# Altium PCB Radar.PcbDoc (part 1 of 3)
Units mil, origin at the board's own origin, x right, y up, seen from the top; angles counter-clockwise.
Board outline 2145 x 1580 mil, 4 copper layers (Layer 1, Layer 2, Layer 3, Layer 4), stack 61.58 mil thick; 62 components, 38 nets, 226 pads, 53 vias.
Unrouted connection lines stored in the file: 17.
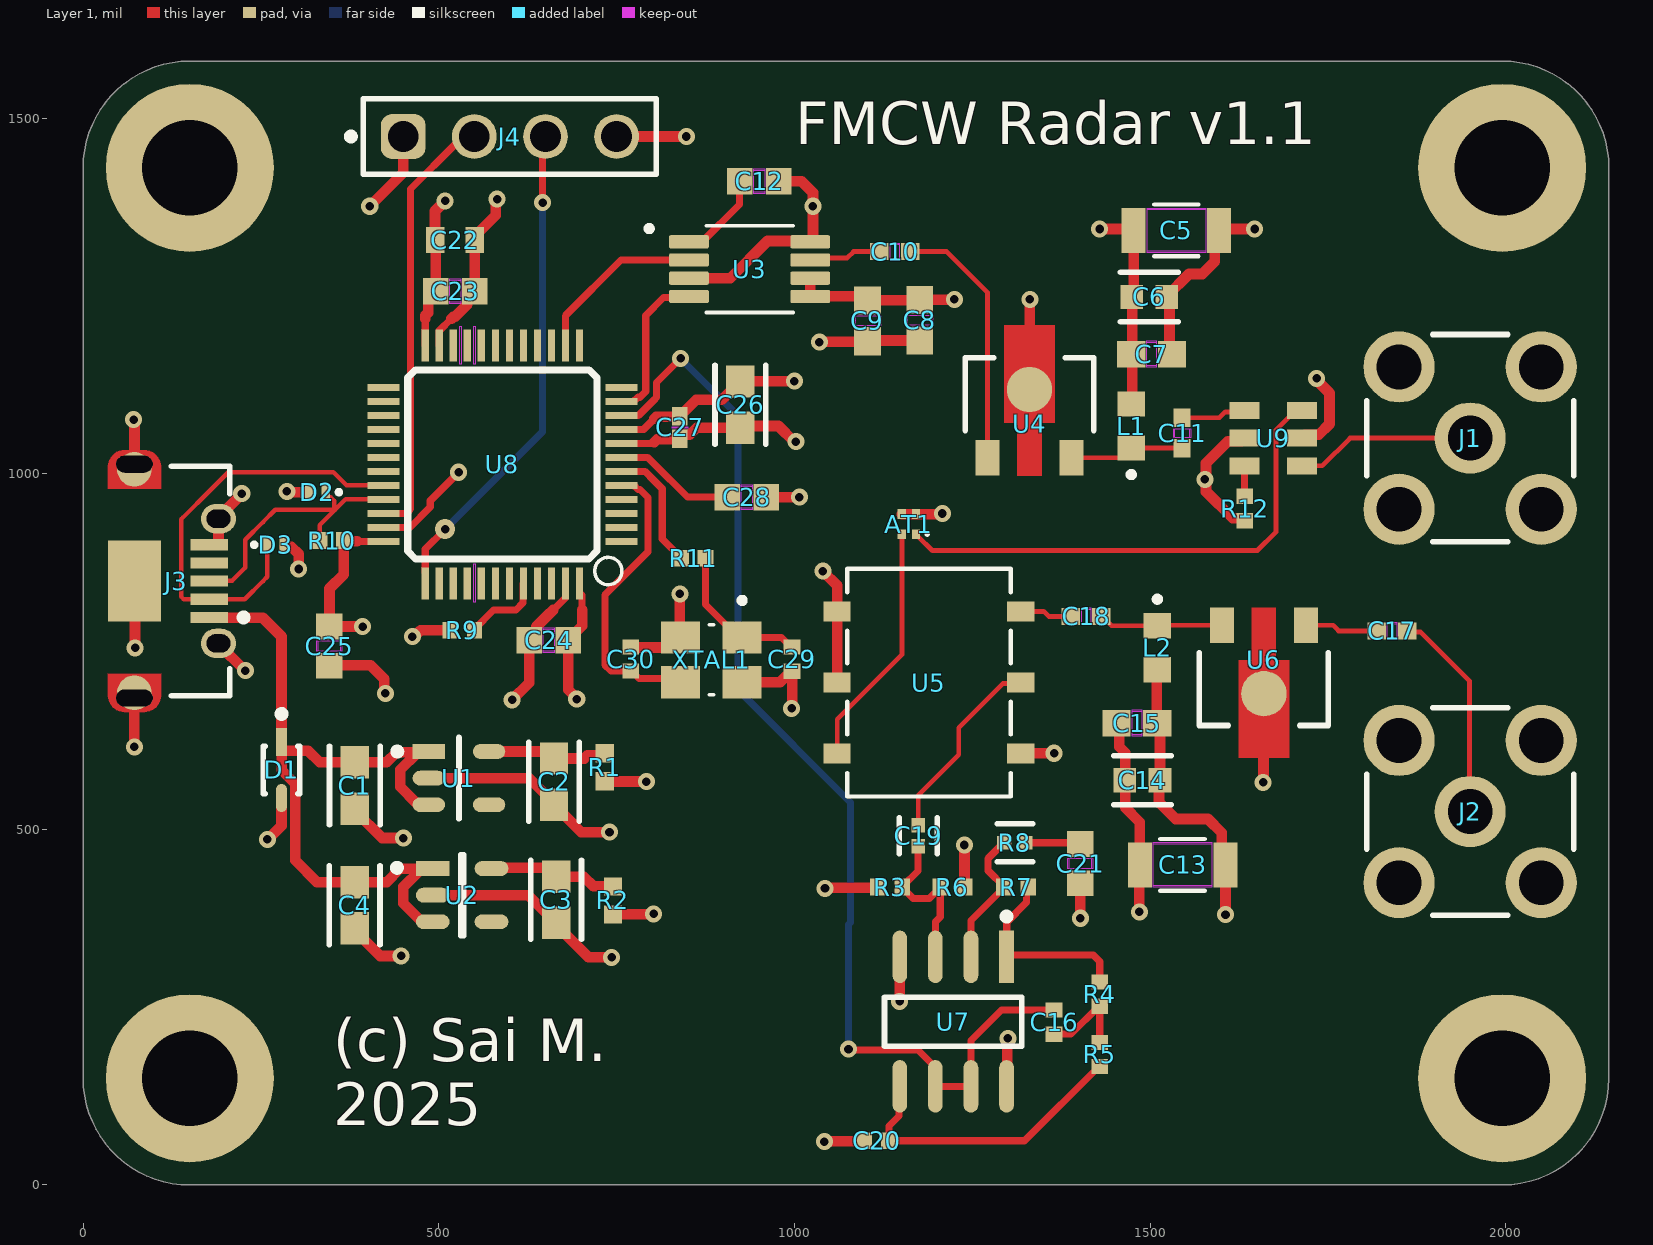
[diagram p0: Layer 1 view]
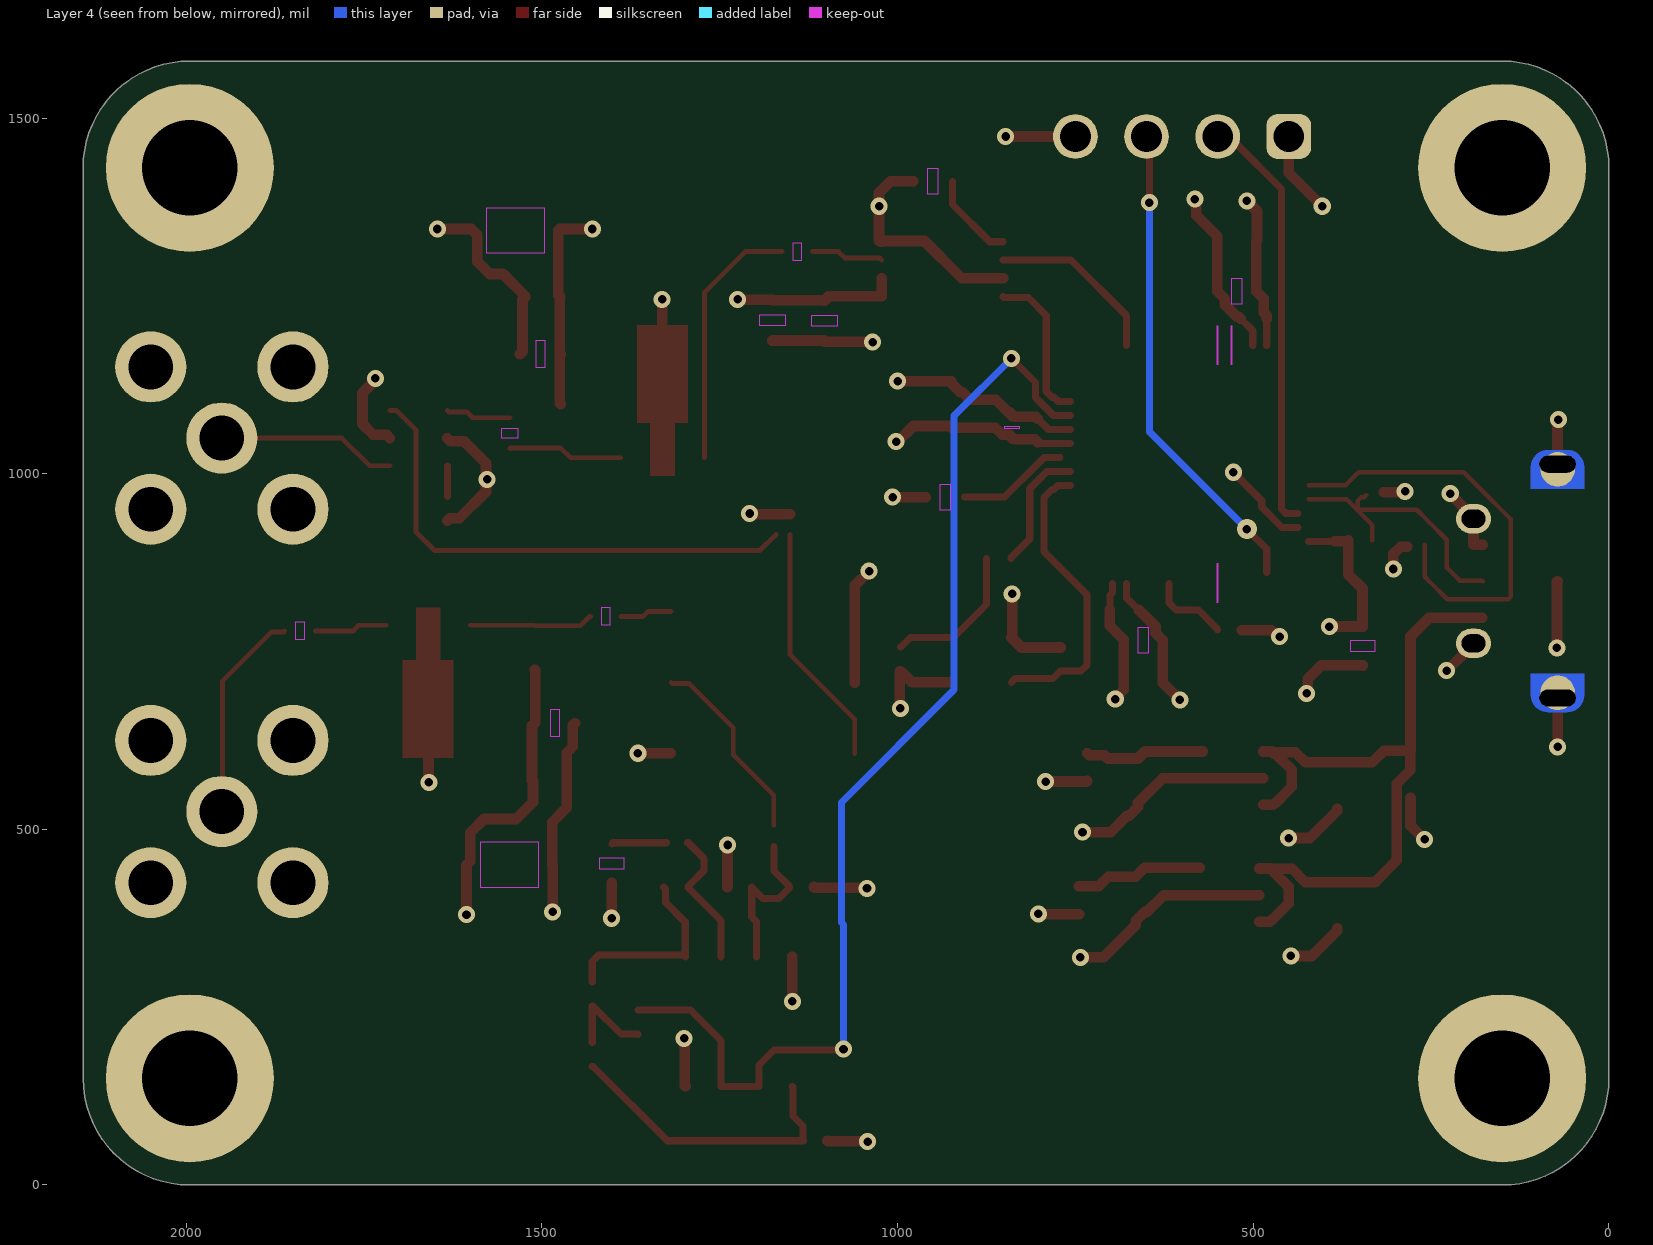
[diagram p1: Layer 4 view, seen from below]
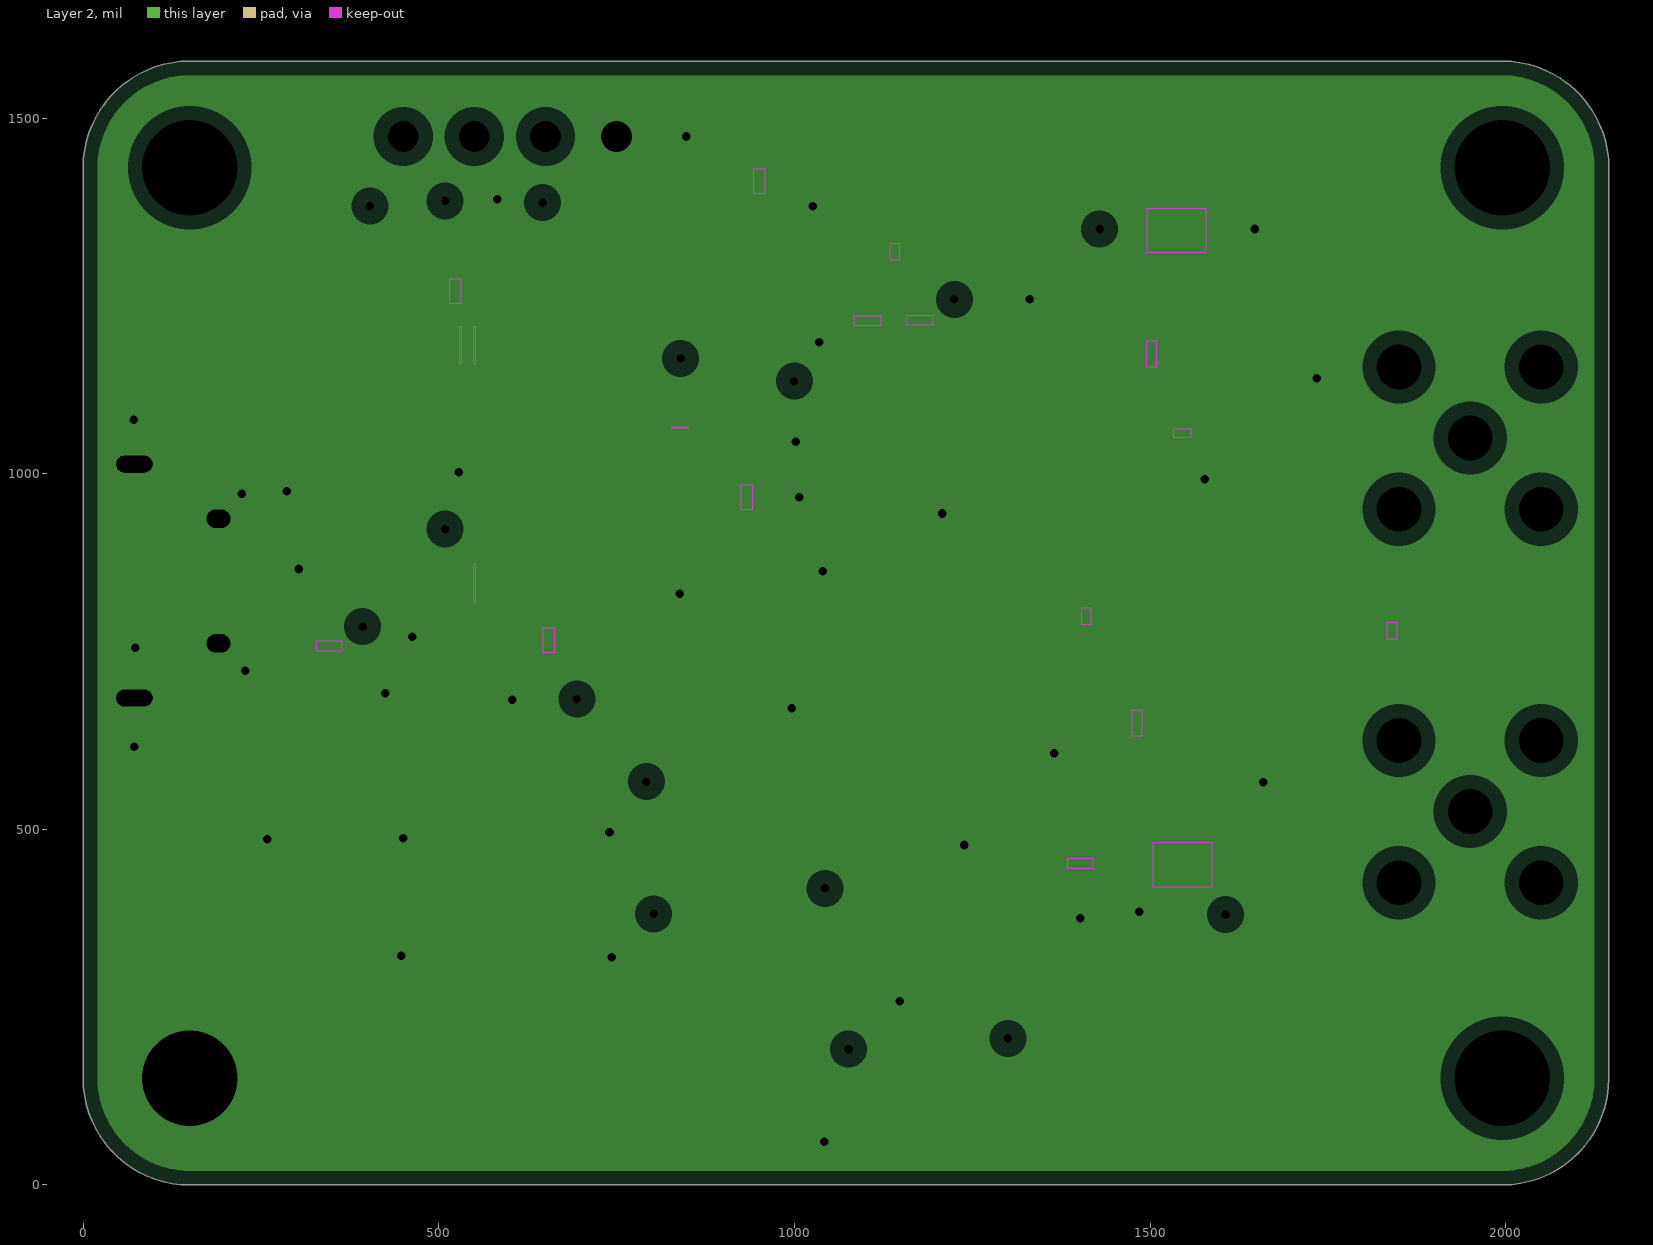
[diagram p2: Layer 2, clearances drawn from the general rule]
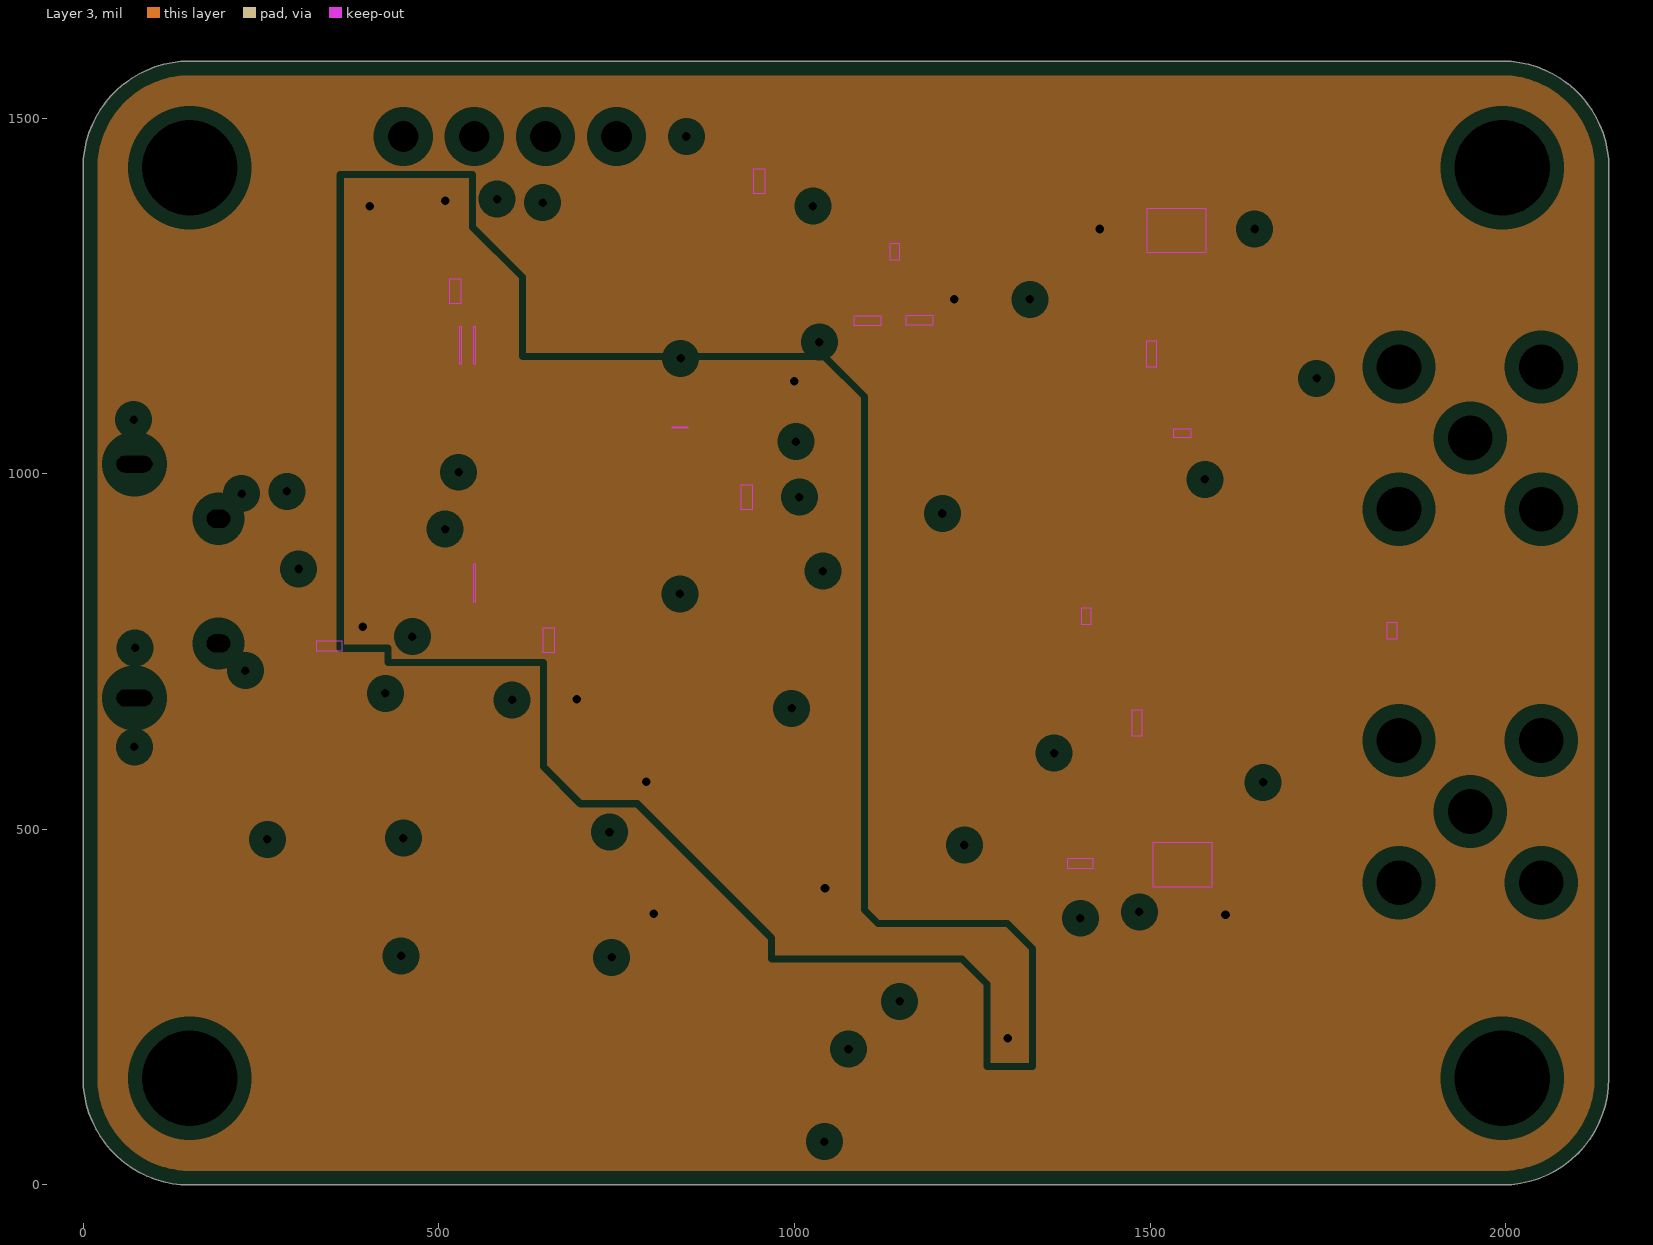
[diagram p3: Layer 3, clearances drawn from the general rule]
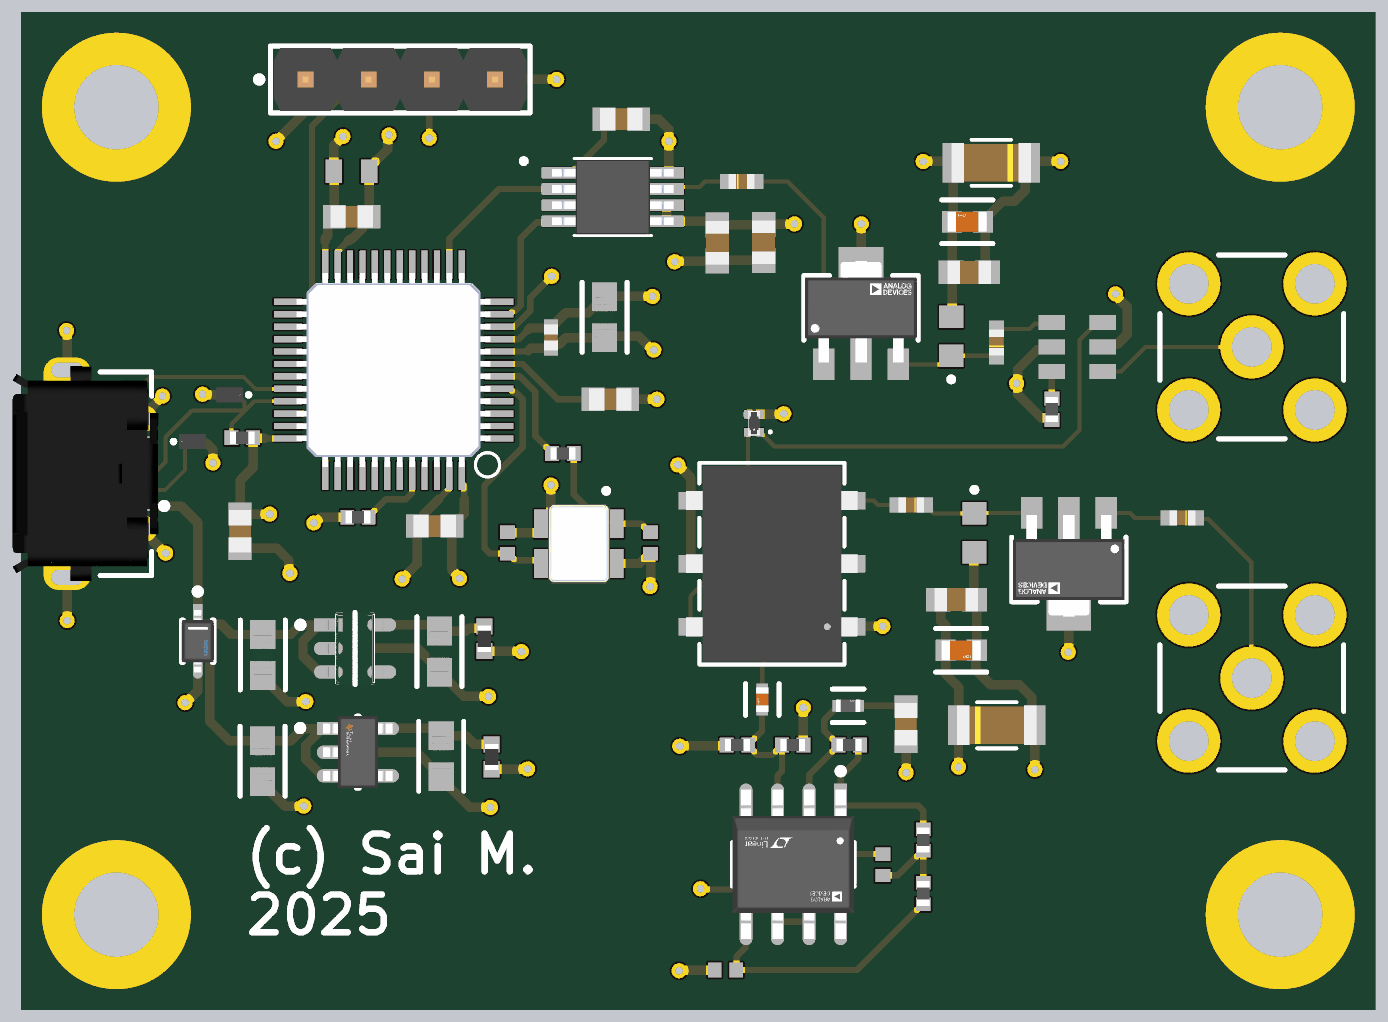
[diagram p5: 3D render of the assembled board from above, using the file's embedded part models]

## Layer stack, top to bottom
Top Solder: solder mask 0.4, Solder Resist, Dk 3.8
Layer 1: signal copper 1.38
Dielectric 2: prepreg 3.91, 3313 RC57%, Dk 4.1
Layer 2: plane copper 0.6, net GND
Dielectric 1: core 49.8, FR-4, Dk 4.6
Layer 3: plane copper 0.6, net +5V
Dielectric 3: prepreg 3.91, 3313 RC57%, Dk 4.1
Layer 4: signal copper 1.38
Bottom Solder: solder mask 0.4, Solder Resist, Dk 3.8

## Board outline
0,150 0,1430 cw(c150,1430) 150,1580 1995,1580 cw(c1995,1430) 2145,1430 2145,150 cw(c1995,150) 1995,0 150,0 cw(c150,150)

## Design rules (kind name [scope] priority, off if disabled: settings)
Clearance "Keepout & Pad Distance" [(IsPad OR IsTrack) vs (IsKeepOut)] p1: gap=0 ignorepadtopadclearanceinfootprint=TRUE
Clearance [NOT WithinRoom('USB') vs NOT WithinRoom('USB')] p2: gap=10 ignorepadtopadclearanceinfootprint=TRUE except(3.5: Arc-Arc Arc-Track Track-Track; 3.94: Arc-SMDPad Track-SMDPad; 5.91: SMDPad-SMDPad; 7.87: Arc-Via Track-Via; 11.02: Arc-THPad Track-THPad)
DiffPairsRouting DIFF90 [InDifferentialPairClass('USB')] p1: maxlimit=8.1 minlimit=8 mostfreqgap=8 toplayer_minwidth=6.23 toplayer_maxwidth=6.43 toplayer_prefwidth=6.23 bottomlayer_minwidth=6.23 bottomlayer_maxwidth=6.43 bottomlayer_prefwidth=6.23 maxuncoupledlength=500
HoleSize [All] p1: absolutevalues=TRUE maxlimit=248.03 minlimit=5.91 maxpercent=80.000 minpercent=20.000
MinimumSolderMaskSliver [All] p1: minsoldermaskwidth=3.94
PlaneClearance [All] p1: clearance=20
PlaneConnect [All] p1: planeconnectstyle=Direct reliefexpansion=20 reliefentries=4 reliefconductorwidth=10 reliefairgap=10
PolygonConnect [All] p1: connectstyle=Relief reliefconductorwidth=10 reliefentries=4 polygonreliefangle="90 Angle" airgapwidth=10
RoomDefinition Attenuator [False vs False] p1: confinementstyle=ConfineIn formatcopy=TRUE lockcomponents=FALSE outline 1139.37,956.91 1193,956.91 1193,901.65 1139.37,901.65
RoomDefinition USB [False vs False] p2: confinementstyle=ConfineIn formatcopy=TRUE lockcomponents=FALSE outline 141,976 253,976 253,719 141,719
RoomDefinition STM32 [False vs False] p3: confinementstyle=ConfineIn formatcopy=TRUE lockcomponents=FALSE outline 385,1218 803,1218 803,808.32 385,808.32
RoutingVias [All] p1: holewidth=12 width=24 viastyle="Through Hole" minholewidth=12 minwidth=24 maxholewidth=12 maxwidth=24
SilkToSolderMaskClearance [IsPad] p1: minsilkscreentomaskgap=3.94 clearancetoexposedcopper=FALSE
SolderMaskExpansion [All] p1: expansion=3 istentingtop=FALSE
SupplyNets "Schematic Supply Nets_3" [InNet('+5V')] p1: voltage=0.000
SupplyNets "Schematic Supply Nets_2" [InNet('GND')] p2: voltage=0.000
SupplyNets "Schematic Supply Nets_1" [InNet('+3V3')] p3: voltage=0.000
SupplyNets "Schematic Supply Nets" [InNet('VBUS')] p4: voltage=0.000
Width "RF Traces" [InNetClass('RF_Trace')] p1: maxlimit=6.68 minlimit=6.68 preferedwidth=6.68 impedanceprofiledriven=TRUE impedanceprofileid={13399BCB-B655-4F76-96A9-7004584BC017} impedanceprofilevalue=50.000000 minimp=50.000000 maximp=50.000000 favimp=50.000000
Width Power/GND [(InNet('+5V') OR InNet('+3V3') OR InNet('VBUS') OR InNet('GND') OR InNet('NetC2_2') OR InNet('NetC3_2')) AND (NOT WithinRoom('STM32'))] p2: maxlimit=15 minlimit=15 preferedwidth=15 minimp=50.000000 maximp=50.000000 favimp=50.000000
Width Signal [All] p3: maxlimit=10 minlimit=10 preferedwidth=10
24 further rules are at their usual default settings.

## Classes and differential pairs
net class RF_Trace: NetAT1_2 NetC10_1 NetC10_2 NetC11_1 NetC11_2 NetC17_1 NetC17_2 NetC18_1 NetC18_2 NetC19_1 NetJ1_1 SPLT_TX_OUT
differential pair class USB: USB
component class Transmitter-2.4GHz: C5 C6 C7 C8 C9 C10 C11 C12 J1 L1 R12 U3 U4 U9 Wilkinson1
component class Receiver-2.4GHz: AT1 C13 C14 C15 C16 C17 C18 C19 C20 C21 J2 L2 R3 R4 R5 R6 R7 R8 U5 U6 U7
component class Power: C1 C2 C3 C4 R1 R2 U1 U2
component class MCU: C22 C23 C24 C25 C26 C27 C28 C29 C30 D1 D2 D3 J3 J4 R9 R10 R11 U8 XTAL1
differential pair USB: +USB_P -USB_N

## Components (designator, comment, footprint, x,y, rotation, side; value= is the part's Value field where it differs from the comment)
AT1 "PAT0510S-C-3DB-T10" PAT0510SC3DBT10 1161,929 r180 top
C1 "1uF, 10V" FP-CL10-IPC_A 382.07,561.56 r90 top value=1uF
C2 "1uF, 10V" FP-CL10-IPC_A 662.07,567 r90 top value=1uF
C3 "2.2uF, 10V" FP-CL10-IPC_A 665,401 r90 top value=2.2uF
C4 "1uF, 10V" FP-CL10-IPC_A 381.74,393.2 r90 top value=1uF
C5 "10uF, 25V" CAP_CL31_SAM 1537,1342 r180 top value=10uF
C6 "1nF, 50V" FP-0603-L_1_6_0_15-W_0_81-IPC_C 1498.98,1248.38 r180 top value=1nF
C7 "100pF, 50V" CAPC17595_87N_KEM 1502.07,1168.1 r180 top value=100pF
C8 "220pF, 50V" CAPC17595_87N_KEM 1176.06,1215.74 r90 top value=220pF
C9 "220pF, 50V" CAPC17595_87N_KEM 1102.65,1214.91 r90 top value=220pF
C10 "100pF, 50V" CAP_CC0402_YAG 1141.04,1312.19 r0 top value=100pF
C11 "100pF, 50V" CAP_CC0402_YAG 1545,1057 r90 top value=100pF
C12 "0.1uF, 50V" CAP_CC0603_YAG-M 950.5,1411 r180 top value=100nF
C13 "10uF, 25V" CAP_CL31_SAM 1545.66,450.08 r0 top value=10uF
C14 "1nF, 50V" FP-0603-L_1_6_0_15-W_0_81-IPC_C 1489.29,569.04 r0 top value=1nF
C15 "100pF, 50V" CAPC17595_87N_KEM 1481.52,649.32 r0 top value=100pF
C16 "150pF, 16V" CAPC1005X55N 1365,228.99 r90 top
C17 "100pF, 50V" CAP_CC0402_YAG 1840,779 r180 top value=100pF
C18 "100pF, 50V" CAP_CC0402_YAG 1410.17,799.32 r180 top value=100pF
C19 "220nF, 16V" FP-GRM155-0_05-IPC_C 1174,491 r270 top value=220nF
C20 "750pF, 50V" CAPC1005X55N 1115.53,62.17 r0 top value=750pF
C21 "330nF, 25V" CAP_CC0603_YAG-M 1401.71,451.95 r90 top value=330nF
C22 "4.7uF, 10V" CAPC1608X90N 522.72,1328.47 r180 top value=4.7uF
C23 "0.1uF, 50V" CAP_CC0603_YAG-M 523.08,1256.47 r180 top value=100nF
C24 "0.1uF, 50V" CAP_CC0603_YAG-M 654.5,766 r0 top value=100nF
C25 "0.1uF, 50V" CAP_CC0603_YAG-M 346,757.69 r90 top value=100nF
C26 "1uF, 10V" FP-CL10-IPC_A 924,1097 r90 top value=1uF
C27 "10nF, 50V" CAPC10555_55N_KEM 839,1065 r90 top value=10nF
C28 "0.1uF, 50V" CAP_CC0603_YAG-M 933,967 r180 top value=100nF
C29 "8pF, 50V" CAPC1005X55N 996.52,739.32 r90 top value=8pF
C30 "8pF, 50V" CAPC1005X55N 769.82,739.44 r270 top value=8pF
D1 "DESD5V0S1BA-7" FP-SOD323-IPC_C 278.98,583.46 r270 top
D2 "DESD3V3E1BL-7B" CR_X1-DFN1006-2_DIO 329.5,974 r180 top
D3 "DESD3V3E1BL-7B" CR_X1-DFN1006-2_DIO 270.51,899.98 r0 top
J1 "CONREVSMA002" CON-REVSMA-RA 1950,1050 r0 top
J2 "CONREVSMA002" CON-REVSMA-RA 1950,525 r0 top
J3 "USB Micro A/B Connector" FP-47590-0001-MFG 80,849 r270 top
J4 "1x4 Male Headers" 61300411121 600,1474 r0 top
L1 "100nH" INDC1608X95N 1473.5,1066.95 r270 top
L2 "100nH" INDC1608X95N 1510.17,755.23 r90 top
R1 "0" RESC1005X40X25ML05T05 733.33,587.38 r270 top value=0R
R2 "0" RESC1005X40X25ML05T05 744.84,400.16 r270 top value=0R
R3 "33K" RESC1005X40N 1134.54,418.91 r180 top
R4 "10K" RESC1005X37N 1429.17,268.33 r270 top value=10kR
R5 "10K" RESC1005X37N 1429.17,183.53 r270 top value=10kR
R6 "33K" RESC1005X40N 1222.16,418.91 r180 top
R7 "300K" RESC1005X40N 1311.64,418.91 r0 top value=300kR
R8 "1K" FP-RC0402-0_4-IPC_C 1309.96,481.07 r0 top value=1kR
R9 "10K" RESC1005X37N 533.01,780 r0 top value=10kR
R10 "1.5K" RESC1005X40N 349.51,906.01 r180 top value=1.5kR
R11 "390" RESC1005X40N 857.87,881 r0 top value=390R
R12 "50" RESC1005X35N 1633,951 r90 top value=50R
U1 "MIC5317-3.3YM5-TR" FP-SOT23-5LD-PL-1-IPC_C 528.4,572 r0 top
U2 "TPS7A2450DBVR" FP-DBV0005A-IPC_C 532.85,407.46 r0 top
U3 "MAX2750AUA+" SOP65P490X110-8N 936.94,1287.6 r0 top
U4 "ADL5545ARKZ-R7" ADL5545ARKZ-R7 1330.5,1111.95 r0 top
U5 "IC MIXER 200MHZ-3GHZ SMD" CD542_MNC 1189.17,706.32 r180 top
U6 "ADL5545ARKZ-R7" ADL5545ARKZ-R7 1659.93,697.15 r180 top
U7 "LT6231IS8#PBF" FP-LT6231IS8#PBF-IPC_C 1223.17,229.71 r270 top
U8 "STM32F303CBT6" LQFP-48 589.32,1013.14 r90 top
U9 "BDCN-10-25+" BDCN-10-25+ 1633,1088.98 r0 top
XTAL1 "16 MHz, 9 pF" XTAL_TSX-3225_16.0000MF18X-AC0 883.17,738.18 r270 top

## Footprints (in the part's own frame and the unit in brackets; to place one, negate y for a bottom-side part, rotate by r counter-clockwise, add the part's x,y. Pads: shape width x height; smd on the part's side, far side on the other; paste and mask are expansions set on the pad)
61300411121 [mm] "Pin Header, pitch 2.54 mm, THT, Vertical, single row, 4p"
  rrect50% 1.6x1.6 hole 1.1: 1(-3.81,0)
  round 1.6 hole 1.1: 2(-1.27,0) 3(1.27,0) 4(3.81,0)
  silkscreen extent -5.8,-1.35 5.23,1.35, body extent -5.08,-1.27 5.08,1.27, height 8.57
ADL5545ARKZ-R7 [mm]
  rect 0.86x1.27 smd paste+0 mask+0: 1(-1.5,-2.278) 3(1.5,-2.278)
  round 1.62 smd paste+0 mask+0: 2(0,0.164)
  Layer 1 region: -0.9,2.458 0.9,2.458 0.9,-1.022 0.43,-1.022 0.43,-2.913 -0.43,-2.913 -0.43,-1.022 -0.9,-1.022 -0.9,2.458
  silkscreen extent -2.3,-1.3 2.3,1.3, body extent -2.4,-3.01 2.4,2.56, height 0.25
BDCN-10-25+ [mm]
  rect 1.07x0.61 smd paste+0 mask+0: 1(0,0) 2(0,-0.99) 3(0,-1.98) 4(2.05,-1.98) 5(2.05,-0.99) 6(2.05,0)
CAP_CC0402_YAG [mil]
  rect 26x24 smd paste+0 mask+0: 1(-21.5,0) 2(21.5,0)
  Layer 1 keep-out region: -6.5,-10 -6.5,10 6.5,10 6.5,-10
  Keep-Out Layer region: -6.5,-12 -6.5,12 6.5,12 6.5,-12
  body extent -21,-12 21,12, height 22
CAP_CC0603_YAG-M [mil]
  rect 36x37 smd paste+0 mask+0: 1(-27.5,0) 2(27.5,0)
  Layer 1 keep-out region: -7.5,-15.5 -7.5,15.5 7.5,15.5 7.5,-15.5
  Keep-Out Layer region: -7.5,-17.5 -7.5,17.5 7.5,17.5 7.5,-17.5
  body extent -34,-17 34,17, height 35
CAP_CL31_SAM [mm]
  rect 0.856x1.6 smd paste+0 mask+0: 1(-1.528,0) 2(1.528,0)
  Layer 1 keep-out region: -1.049,-0.749 -1.049,0.749 1.049,0.749 1.049,-0.749
  Keep-Out Layer region: -1.049,-0.8 -1.049,0.8 1.049,0.8 1.049,-0.8
  silkscreen extent -0.79,-0.93 0.79,0.93, body extent -1.6,-0.8 1.6,0.8, height 1
CAPC1005X55N [mm]
  rect 0.54x0.6 smd: 1(-0.432,0) 2(0.432,0)
CAPC1608X90N [mil]
  rect 26x37 smd: 1(-28,0) 2(28,0)
CAPC10555_55N_KEM [mm]
  rect 0.653x0.55 smd paste+0 mask+0: 1(-0.402,0) 2(0.402,0)
  Layer 1 keep-out region: -0.024,-0.224 -0.024,0.224 0.024,0.224 0.024,-0.224
  Keep-Out Layer region: -0.024,-0.275 -0.024,0.275 0.024,0.275 0.024,-0.275
  body extent -0.53,-0.28 0.53,0.28, height 0.55
CAPC17595_87N_KEM [mm]
  rect 1.006x0.95 smd paste+0 mask+0: 1(-0.728,0) 2(0.728,0)
  Layer 1 keep-out region: -0.174,-0.424 -0.174,0.424 0.174,0.424 0.174,-0.424
  Keep-Out Layer region: -0.174,-0.475 -0.174,0.475 0.174,0.475 0.174,-0.475
  body extent -0.87,-0.48 0.87,0.48, height 0.87
CD542_MNC [mil]
  rect 38x28 smd paste+0 mask+0: 1(-129,100) 2(-129,0) 3(-129,-100) 4(129,-100) 5(129,0) 6(129,100)
  silkscreen extent -115,-160 115,160, body extent -136,-155 136,155, height 112
CON-REVSMA-RA [mil] "Connector, RP-SMA Female, 5-Lead, Thru-Hole, Right-Angle, Body 7x7mm"
  round 100 hole 63: 1(0,0) 2(-100,100) 3(100,100) 4(100,-100) 5(-100,-100)
  silkscreen extent -146,-146 146,146
CR_X1-DFN1006-2_DIO [mil]
  rect 12x20 smd paste+0 mask+0: 1(-11.5,0) 2(11.5,0)
  silkscreen extent -33,-3 -27,3, body extent -21,-12 21,12, height 21
FP-0603-L_1_6_0_15-W_0_81-IPC_C [mil]
  rect 31.75x34.18 smd paste+0 mask+0: 1(-24.64,0) 2(24.64,0)
  silkscreen extent -41,-35 41,35, body extent -44,-23 44,23, height 10
FP-47590-0001-MFG [mm]
  rect 0.4x1.35 smd paste+0 mask+0: 1(1.3,2.475) 2(0.65,2.475) 3(0,2.475) 4(-0.65,2.475) 5(-1.3,2.475)
  rrect100% 1.05x1.25 hole 0.85 slot 0.65 at 0 deg paste-2539.97 mask+0: 6(-2.225,2.8) 7(2.225,2.8)
  rrect100% 0.6x1.3 hole 1.3 slot 0.6 at 0 deg paste-2539.97 mask+0: 8(-4.175,-0.2) 10(4.175,-0.2)
  round 1.238 smd paste-1000 mask+0: 8(-3.988,-0.2) 10(3.988,-0.2)
  round 1.238 smd far side paste-1000 mask+0: 8(-3.988,-0.2) 10(3.988,-0.2)
  rect 2.9x1.9 smd paste+0 mask+0: 9(0,-0.2)
  Layer 1 region: 3.3,0.75 4.075,0.75 4.305,0.704 4.499,0.574 4.629,0.38 4.675,0.15 4.675,0.15 4.675,-0.55 4.629,-0.78 4.499,-0.974 4.305,-1.104 4.075,-1.15 4.075,-1.15 3.3,-1.15
  Layer 1 region: -3.3,-1.15 -4.075,-1.15 -4.305,-1.104 -4.499,-0.974 -4.629,-0.78 -4.675,-0.55 -4.675,-0.55 -4.675,0.15 -4.629,0.38 -4.499,0.574 -4.305,0.704 -4.075,0.75 -4.075,0.75 -3.3,0.75
  Layer 4 region: 3.3,0.75 4.075,0.75 4.305,0.704 4.499,0.574 4.629,0.38 4.675,0.15 4.675,0.15 4.675,-0.55 4.629,-0.78 4.499,-0.974 4.305,-1.104 4.075,-1.15 4.075,-1.15 3.3,-1.15
  Layer 4 region: -3.3,-1.15 -4.075,-1.15 -4.305,-1.104 -4.499,-0.974 -4.629,-0.78 -4.675,-0.55 -4.675,-0.55 -4.675,0.15 -4.629,0.38 -4.499,0.574 -4.305,0.704 -4.075,0.75 -4.075,0.75 -3.3,0.75
  silkscreen extent -4.1,1.13 4.1,3.83, body extent -4.77,-3.25 4.77,3.52, height 0.25
FP-CL10-IPC_A [mil]
  rect 45.6x39.85 smd paste+0 mask+0: 1(-32.56,0) 2(32.56,0)
  silkscreen extent -55,-36 55,36, body extent -75,-40 75,40, height 10
FP-DBV0005A-IPC_C [mm]
  rect 1.205x0.532 smd paste+0 mask+0: 1(-1.05,0.95)
  rrect100% 1.205x0.532 smd paste+0 mask+0: 2(-1.05,0) 3(-1.05,-0.95) 4(1.05,-0.95) 5(1.05,0.95)
  silkscreen extent -2.45,-1.45 0.05,1.45, body extent -1.75,-1.55 1.75,1.55, height 0.25
FP-GRM155-0_05-IPC_C [mil]
  rect 20.29x18.6 smd paste+0 mask+0: 1(-14.9,0) 2(14.9,0)
  silkscreen extent -25,-27 25,27, body extent -29,-15 29,15, height 10
FP-LT6231IS8#PBF-IPC_C [mil]
  rect 73.9x20.52 smd paste+0 mask+0: 1(-91.06,75)
  rrect100% 73.9x20.52 smd paste+0 mask+0: 2(-91.06,25) 3(-91.06,-25) 4(-91.06,-75) 5(91.06,-75) 6(91.06,-25) 7(91.06,25) 8(91.06,75)
  silkscreen extent -153,-97 34,97, body extent -132,-100 132,100, height 10
FP-RC0402-0_4-IPC_C [mil]
  rect 20.29x18.6 smd paste+0 mask+0: 1(-14.9,0) 2(14.9,0)
  silkscreen extent -25,-27 25,27, body extent -29,-15 29,15, height 10
FP-SOD323-IPC_C [mil]
  rect 39.59x15.45 smd paste+0 mask+0: 1(-39.38,0)
  rrect100% 39.59x15.45 smd paste+0 mask+0: 2(39.38,0)
  silkscreen extent -84,-26 33,26, body extent -63,-30 63,30, height 10
FP-SOT23-5LD-PL-1-IPC_C [mm]
  rect 1.156x0.53 smd paste+0 mask+0: 1(-1.075,0.95)
  rrect100% 1.156x0.53 smd paste+0 mask+0: 2(-1.075,0) 3(-1.075,-0.95) 4(1.075,-0.95) 5(1.075,0.95)
  silkscreen extent -2.33,-1.45 0,1.45, body extent -1.75,-1.55 1.75,1.55, height 0.25
INDC1608X95N [mm]
  rect 0.9x0.97 smd: 1(-0.785,0) 2(0.785,0)
  silkscreen extent 1.64,-0.1 1.83,0.1
LQFP-48 [mil]
  rect 10x45 smd mask+2.5: 1(-108.27,-167.32) 2(-88.58,-167.32) 3(-68.9,-167.32) 4(-49.21,-167.32) 5(-29.53,-167.32) 6(-9.84,-167.32) 7(9.84,-167.32) 8(29.53,-167.32) 9(49.21,-167.32) 10(68.9,-167.32) 11(88.58,-167.32) 12(108.27,-167.32) 25(108.27,167.32) 26(88.58,167.32) 27(68.9,167.32) 28(49.21,167.32) 29(29.53,167.32) 30(9.84,167.32) 31(-9.84,167.32) 32(-29.53,167.32) 33(-49.21,167.32) 34(-68.9,167.32) 35(-88.58,167.32) 36(-108.27,167.32)
  rect 45x10 smd mask+2.5: 13(167.32,-108.27) 14(167.32,-88.58) 15(167.32,-68.9) 16(167.32,-49.21) 17(167.32,-29.53) 18(167.32,-9.84) 19(167.32,9.84) 20(167.32,29.53) 21(167.32,49.21) 22(167.32,68.9) 23(167.32,88.58) 24(167.32,108.27) 37(-167.32,108.27) 38(-167.32,88.58) 39(-167.32,68.9) 40(-167.32,49.21) 41(-167.32,29.53) 42(-167.32,9.84) 43(-167.32,-9.84) 44(-167.32,-29.53) 45(-167.32,-49.21) 46(-167.32,-68.9) 47(-167.32,-88.58) 48(-167.32,-108.27)
  Keep-Out Layer region: 194,58 141,58 141,60 194,60
  Keep-Out Layer region: 194,38 141,38 141,40 194,40
  Keep-Out Layer region: -140,38 -194,38 -194,40 -140,40
  silkscreen extent -169,-168 133,133, body extent -177,-177 177,177, height 29
PAT0510SC3DBT10 [mm]
  rect 0.3x0.35 smd mask+0.025: 1(-0.25,0.36) 2(0.25,0.36) A3(-0.25,-0.36) B3(0.25,-0.36)
  silkscreen extent -0.7,0.3 -0.6,0.4, body extent -0.25,-0.5 0.25,0.5, height 0.34
RESC1005X35N [mm]
  rect 0.56x0.6 smd: 1(-0.435,0) 2(0.435,0)
  body extent -0.5,-0.25 0.5,0.25, height 0.35
RESC1005X37N [mm]
  rect 0.54x0.6 smd: 1(-0.432,0) 2(0.432,0)
  body extent -0.5,-0.25 0.5,0.25, height 0.37
RESC1005X40N [mm]
  rect 0.56x0.6 smd: 1(-0.435,0) 2(0.435,0)
  body extent -0.5,-0.25 0.5,0.25, height 0.4
RESC1005X40X25ML05T05 [mm] "Chip Resistor, 2-Leads, Body 1.05x0.55mm, IPC Low Density"
  rect 0.65x0.65 smd: 1(-0.5,0) 2(0.5,0)
  body extent -0.53,-0.28 0.53,0.28, height 0.4
SOP65P490X110-8N [mm]
  rrect25% 1.42x0.47 smd mask+0.025: 1(-2.165,0.975) 2(-2.165,0.325) 3(-2.165,-0.325) 4(-2.165,-0.975) 5(2.165,-0.975) 6(2.165,-0.325) 7(2.165,0.325) 8(2.165,0.975)
  silkscreen extent -3.68,-1.55 1.55,1.55, body extent -2.45,-1.5 2.45,1.5, height 1.1
XTAL_TSX-3225_16.0000MF18X-AC0 [mm]
  rect 1.15x1.4 smd: 1(-0.8,1.1) 2(-0.8,-1.1) 3(0.8,-1.1) 4(0.8,1.1)
  silkscreen extent -2.22,-0.08 1.25,1.2, body extent -1.6,-1.25 1.6,1.25, height 0.6

## Part data
AT1: "Fixed Attenuator, 0MHz Min, 10000MHz Max", Manufacturer=Susumu, Operating Frequency-Max=10GHz, Operating Frequency-Min=0MHz, Supplier Part Number=PAT05S3CT-ND, Attenuation-Nom=3dB, Category="Chip SMD Resistors", Characteristic Impedance=50R, ComponentLink1Description=https://datasheet.ciiva.com:443/pdfs/VipMasterIC/IC/SUSU/SUSU-S-A0003406171/SUSU-S-A0003406171-1.pdf?src-supplier=IHS+Markit, ComponentLink1URL=https://datasheet.ciiva.com:443/pdfs/VipMasterIC/IC/SUSU/SUSU-S-A0003406171/SUSU-S-A0003406171-1.pdf?src-supplier=IHS+Markit, ComponentLink2Description=https://datasheet.ciiva.com/15101/getdatasheetpartid-506863-15101147.pdf?src-supplier=Verical, ComponentLink2URL=https://datasheet.ciiva.com/15101/getdatasheetpartid-506863-15101147.pdf?src-supplier=Verical, ComponentLink3Description=https://datasheet.ciiva.com/2788/products-38-2788347.pdf?src-supplier=Digikey, ComponentLink3URL=https://datasheet.ciiva.com/2788/products-38-2788347.pdf?src-supplier=Digikey, ComponentLink4Description=https://datasheet.ciiva.com/2788/products-38-2788348.pdf?src-supplier=Digikey, ComponentLink4URL=https://datasheet.ciiva.com/2788/products-38-2788348.pdf?src-supplier=Digikey, ComponentLink5Description=https://datasheet.ciiva.com/2788/products-38-2788349.pdf?src-supplier=Digikey, ComponentLink5URL=https://datasheet.ciiva.com/2788/products-38-2788349.pdf?src-supplier=Digikey, Construction=COMPONENT, JESD-609 Code=e3, Manufacturer Part Number=PAT0510S-C-3DB-T10, Pricing="1=0.12, 10=0.1, 25=0.0936, 100=0.0853, 250=0.08036, 500=0.07684, 1000=0.07351, 5000=0.06646 (USD)", Reach SVHC Compliant=Yes, RF/Microwave Device Type="FIXED ATTENUATOR", RoHS=Yes, RoHS Compliant=Yes, Stock=205212, Supplier=Digikey, Terminal Finish=Tin, VSWR-Max=1.3
C1 C2 C4 C26: library part CL10B105KP8NNNC, "Ceramic Capacitor, Multilayer, Ceramic, 10V, 10% +Tol, 10% -Tol, X7R, 15% TC, 1uF, Surface Mount, 0603", Capacitor Type=Ceramic, Case/Package=0603, Manufacturer=Samsung, Max Operating Temperature=125°C, Min Operating Temperature=-55°C, Package Shape=Rectangular, Package Style=SMTMeter, Rated DC Voltage (URdc)=10V, Supplier Part Number=1276-1946-6-ND, Temperature Characteristics Code=X7R, Tolerance  (fill in as +-)=10%, Category="Ceramic Capacitors", ComponentLink1Description=https://datasheet.ciiva.com:443/pdfs/VipMasterIC/IC/SEMS/SEMS-S-A0008526420/SEMS-S-A0008526450-1.pdf?src-supplier=IHS+Markit, ComponentLink1URL=https://datasheet.ciiva.com:443/pdfs/VipMasterIC/IC/SEMS/SEMS-S-A0008526420/SEMS-S-A0008526450-1.pdf?src-supplier=IHS+Markit, ComponentLink2Description=https://datasheet.ciiva.com/25788/cl10b105kp8nnnc-25788304.pdf?src-supplier=Digikey, ComponentLink2URL=https://datasheet.ciiva.com/25788/cl10b105kp8nnnc-25788304.pdf?src-supplier=Digikey, ComponentLink3Description=https://datasheet.ciiva.com/26838/getdatasheetpartid-358410-26838426.pdf?src-supplier=Verical, ComponentLink3URL=https://datasheet.ciiva.com/26838/getdatasheetpartid-358410-26838426.pdf?src-supplier=Verical, ComponentLink4Description=https://datasheet.ciiva.com/16396/cl10b105kp8nnnc-16396970.pdf?src-supplier=Future+Electronics, ComponentLink4URL=https://datasheet.ciiva.com/16396/cl10b105kp8nnnc-16396970.pdf?src-supplier=Future+Electronics, Dielectric Material=Ceramic, Height=0.9mm, JESD-609 Code=e3, Length=1.6mm, Manufacturer Part Number=CL10B105KP8NNNC, Mounting Technology="Surface Mount", Multilayer=Yes, Packaging="Tape and Reel", Pins=2, Pricing="1=0.08, 10=0.006, 100=0.0056, 1000=0.00528 (USD)", Reach SVHC Compliant=Yes, RoHS=Yes, RoHS Compliant=Yes, Stock=5561968, Supplier=Digikey, Terminal Finish=Nickel, Termination=Wraparound, Tolerance (fill in as +-)=10%, Width=0.8mm
C3: library part CL10B225KP8NNNC, "Ceramic Capacitor, Multilayer, Ceramic, 10V, 10% +Tol, 10% -Tol, X7R, 15% TC, 2.2uF, Surface Mount, 0603", Capacitor Type=Ceramic, Case/Package=0603, Manufacturer=Samsung, Max Operating Temperature=125°C, Min Operating Temperature=-55°C, Package Shape=Rectangular, Package Style=SMTMeter, Rated DC Voltage (URdc)=10V, Supplier Part Number=1276-1134-1-ND, Temperature Characteristics Code=X7R, Tolerance  (fill in as +-)=10%, Category="Ceramic Capacitors", ComponentLink1Description=https://datasheet.ciiva.com:443/pdfs/VipMasterIC/IC/SEMS/SEMS-S-A0008384515/SEMS-S-A0008873307-1.pdf?src-supplier=IHS+Markit, ComponentLink1URL=https://datasheet.ciiva.com:443/pdfs/VipMasterIC/IC/SEMS/SEMS-S-A0008384515/SEMS-S-A0008873307-1.pdf?src-supplier=IHS+Markit, ComponentLink2Description=https://datasheet.ciiva.com/25798/cl10b225kp8nnnc-25798914.pdf?src-supplier=Digikey, ComponentLink2URL=https://datasheet.ciiva.com/25798/cl10b225kp8nnnc-25798914.pdf?src-supplier=Digikey, ComponentLink3Description=https://datasheet.ciiva.com/15227/getdatasheetpartid-359568-15227195.pdf?src-supplier=Verical, ComponentLink3URL=https://datasheet.ciiva.com/15227/getdatasheetpartid-359568-15227195.pdf?src-supplier=Verical, ComponentLink4Description=https://datasheet.ciiva.com/16500/cl10b225kp8nnnc-16500695.pdf?src-supplier=Future+Electronics, ComponentLink4URL=https://datasheet.ciiva.com/16500/cl10b225kp8nnnc-16500695.pdf?src-supplier=Future+Electronics, ComponentLink5Description=https://datasheet.ciiva.com/29198/457933-da-01-en-vs-kondensator-0603-29198589.pdf?src-supplier=Conrad, ComponentLink5URL=https://datasheet.ciiva.com/29198/457933-da-01-en-vs-kondensator-0603-29198589.pdf?src-supplier=Conrad, Dielectric Material=Ceramic, Height=0.9mm, JESD-609 Code=e3, Length=1.6mm, Manufacturer Part Number=CL10B225KP8NNNC, Mounting Technology="Surface Mount", Multilayer=Yes, Packaging="Tape and Reel", Pins=2, Pricing="1=0.08, 10=0.017, 100=0.0136, 1000=0.01206 (USD)", Reach SVHC Compliant=Yes, RoHS=Yes, RoHS Compliant=Yes, Stock=86850, Supplier=Digikey, Terminal Finish=Nickel, Termination=Wraparound, Tolerance (fill in as +-)=10%, Width=0.8mm
C5 C13: library part CL31B106KAHNNNE, "Ceramic Capacitor, Multilayer, Ceramic, 25V, 10% +Tol, 10% -Tol, X7R, 15% TC, 10uF, Surface Mount, 1206", Capacitor Type=Ceramic, Case/Package=1206, Manufacturer=Samsung, Max Operating Temperature=125°C, Min Operating Temperature=-55°C, Package Shape=Rectangular, Package Style=SMTMeter, Rated DC Voltage (URdc)=25V, Supplier Part Number=1276-1804-1-ND, Temperature Characteristics Code=X7R, Tolerance  (fill in as +-)=10%, Category="Ceramic Capacitors", ComponentLink1Description=https://datasheet.ciiva.com:443/pdfs/VipMasterIC/IC/SEMS/SEMS-S-A0008384515/SEMS-S-A0008872888-1.pdf?src-supplier=IHS+Markit, ComponentLink1URL=https://datasheet.ciiva.com:443/pdfs/VipMasterIC/IC/SEMS/SEMS-S-A0008384515/SEMS-S-A0008872888-1.pdf?src-supplier=IHS+Markit, ComponentLink2Description=https://datasheet.ciiva.com/25795/cl31b106kahnnne-25795260.pdf?src-supplier=Digikey, ComponentLink2URL=https://datasheet.ciiva.com/25795/cl31b106kahnnne-25795260.pdf?src-supplier=Digikey, ComponentLink3Description=https://datasheet.ciiva.com/26838/getdatasheetpartid-356415-26838914.pdf?src-supplier=Verical, ComponentLink3URL=https://datasheet.ciiva.com/26838/getdatasheetpartid-356415-26838914.pdf?src-supplier=Verical, ComponentLink4Description=https://datasheet.ciiva.com/16498/cl03a105mq3csnc-16498474.pdf?src-supplier=Future+Electronics, ComponentLink4URL=https://datasheet.ciiva.com/16498/cl03a105mq3csnc-16498474.pdf?src-supplier=Future+Electronics, Dielectric Material=Ceramic, Height=1.8mm, JESD-609 Code=e3, Length=3.2mm, Manufacturer Part Number=CL31B106KAHNNNE, Mounting Technology="Surface Mount", Multilayer=Yes, Packaging="Tape and Reel", Pins=2, Pricing="1=0.1, 10=0.043, 100=0.0358 (USD)", Reach SVHC Compliant=Yes, RoHS=Yes, RoHS Compliant=Yes, Stock=2651645, Supplier=Digikey, Terminal Finish=Nickel, Termination=Wraparound, Tolerance (fill in as +-)=10%, Width=1.6mm
C6: library part 06035A102JAT2A, "Ceramic Capacitor, Multilayer, Ceramic, 50V, 5% +Tol, 5% -Tol, C0G, 30ppm/Cel TC, 0.001uF, Surface Mount, 0603", Capacitor Type=Ceramic, Case/Package=0603, Manufacturer="Kyocera AVX", Max Operating Temperature=125°C, Min Operating Temperature=-55°C, Package Shape=Rectangular, Package Style=SMTMeter, Rated DC Voltage (URdc)=50V, Supplier Part Number=478-KGM15ACG1H102JTCT-ND, Temperature Characteristics Code=C0G, Tolerance  (fill in as +-)=5%, Category="Ceramic Capacitors", ComponentLink1Description=https://datasheet.ciiva.com:443/pdfs/VipMasterIC/IC/AVXC/AVXC-S-A0008899940/AVXC-S-A0008899940-1.pdf?src-supplier=IHS+Markit, ComponentLink1URL=https://datasheet.ciiva.com:443/pdfs/VipMasterIC/IC/AVXC/AVXC-S-A0008899940/AVXC-S-A0008899940-1.pdf?src-supplier=IHS+Markit, ComponentLink2Description=https://datasheet.ciiva.com/11786/0900766b802d4697-11786950.pdf?src-supplier=Rs, ComponentLink2URL=https://datasheet.ciiva.com/11786/0900766b802d4697-11786950.pdf?src-supplier=Rs, ComponentLink3Description=https://datasheet.ciiva.com/11464/ccog-11464573.pdf?src-supplier=Avnet, ComponentLink3URL=https://datasheet.ciiva.com/11464/ccog-11464573.pdf?src-supplier=Avnet, ComponentLink4Description=https://datasheet.ciiva.com/16363/ccog-16363640.pdf?src-supplier=Future+Electronics, ComponentLink4URL=https://datasheet.ciiva.com/16363/ccog-16363640.pdf?src-supplier=Future+Electronics, ComponentLink5Description=https://datasheet.ciiva.com/1124/759117-1124717.pdf?src-supplier=Element14, ComponentLink5URL=https://datasheet.ciiva.com/1124/759117-1124717.pdf?src-supplier=Element14, ComponentLink6Description=https://datasheet.ciiva.com/1124/759117-1124716.pdf?src-supplier=Element14, ComponentLink6URL=https://datasheet.ciiva.com/1124/759117-1124716.pdf?src-supplier=Element14, ComponentLink7Description=https://datasheet.ciiva.com/1466/26712-1466099.pdf?src-supplier=Farnell, ComponentLink7URL=https://datasheet.ciiva.com/1466/26712-1466099.pdf?src-supplier=Farnell, ComponentLink8Description=https://datasheet.ciiva.com/1124/26712-1124715.pdf?src-supplier=Element14, ComponentLink8URL=https://datasheet.ciiva.com/1124/26712-1124715.pdf?src-supplier=Element14, ComponentLink9Description=https://datasheet.ciiva.com/150/ccog-150886.pdf?src-supplier=Digikey, ComponentLink9URL=https://datasheet.ciiva.com/150/ccog-150886.pdf?src-supplier=Digikey, ComponentLink10Description=https://datasheet.ciiva.com/150/ccog-150885.pdf?src-supplier=Digikey, ComponentLink10URL=https://datasheet.ciiva.com/150/ccog-150885.pdf?src-supplier=Digikey, ComponentLink11Description=https://datasheet.ciiva.com/150/ccog-150887.pdf?src-supplier=Digikey, ComponentLink11URL=https://datasheet.ciiva.com/150/ccog-150887.pdf?src-supplier=Digikey, ComponentLink12Description=https://datasheet.ciiva.com/14585/70001039-14585948.pdf?src-supplier=Allied+Electronics, ComponentLink12URL=https://datasheet.ciiva.com/14585/70001039-14585948.pdf?src-supplier=Allied+Electronics, Dielectric Material=Ceramic, Height=0.9mm, JESD-609 Code=e3, Length=1.6mm, Manufacturer Part Number=06035A102JAT2A, Mounting Technology="Surface Mount", Multilayer=Yes, Packaging="Tape and Reel", Pins=2, Pricing="4000=0.00488, 8000=0.00454, 16000=0.00447, 24000=0.00439, 32000=0.00431 (USD)", Reach SVHC Compliant=Yes, RoHS=Yes, RoHS Compliant=Yes, Stock=540000, Supplier=Digikey, Terminal Finish=Nickel, Termination=Wraparound, Tolerance (fill in as +-)=5%, Width=0.81mm
C7: library part C0603C101J5GACTU, "Ceramic Capacitor, Multilayer, Ceramic, 50V, 5% +Tol, 5% -Tol, C0G, 30ppm/Cel TC, 0.0001uF, Surface Mount, 0603", Capacitor Type=Ceramic, Case/Package=0603, Manufacturer=KEMET, Max Operating Temperature=125°C, Min Operating Temperature=-55°C, Package Shape=Rectangular, Package Style=SMTMeter, Rated DC Voltage (URdc)=50V, Supplier Part Number=399-C0603C101J5GACTUCT-ND, Temperature Characteristics Code=C0G, Tolerance  (fill in as +-)=5%, Category="Ceramic Capacitors", ComponentLink1Description=https://datasheet.ciiva.com:443/pdfs/VipMasterIC/IC/KEME/KEME-S-A0005605168/KEME-S-A0005605168-1.pdf?src-supplier=IHS+Markit, ComponentLink1URL=https://datasheet.ciiva.com:443/pdfs/VipMasterIC/IC/KEME/KEME-S-A0005605168/KEME-S-A0005605168-1.pdf?src-supplier=IHS+Markit, ComponentLink2Description=https://datasheet.ciiva.com/6126/f9080b-0402-series-c0g-6126680.pdf?src-supplier=Farnell, ComponentLink2URL=https://datasheet.ciiva.com/6126/f9080b-0402-series-c0g-6126680.pdf?src-supplier=Farnell, ComponentLink3Description=https://datasheet.ciiva.com/28645/1789732-28645525.pdf?src-supplier=Element14, ComponentLink3URL=https://datasheet.ciiva.com/28645/1789732-28645525.pdf?src-supplier=Element14, ComponentLink4Description=https://datasheet.ciiva.com/7823/1725423-7823564.pdf?src-supplier=Element14, ComponentLink4URL=https://datasheet.ciiva.com/7823/1725423-7823564.pdf?src-supplier=Element14, ComponentLink5Description=https://datasheet.ciiva.com/7823/1725423-7823565.pdf?src-supplier=Element14, ComponentLink5URL=https://datasheet.ciiva.com/7823/1725423-7823565.pdf?src-supplier=Element14, ComponentLink6Description=https://datasheet.ciiva.com/7823/f9080b-0402-series-c0g-7823964.pdf?src-supplier=Element14, ComponentLink6URL=https://datasheet.ciiva.com/7823/f9080b-0402-series-c0g-7823964.pdf?src-supplier=Element14, ComponentLink7Description=https://datasheet.ciiva.com/7823/1372242-7823965.pdf?src-supplier=Element14, ComponentLink7URL=https://datasheet.ciiva.com/7823/1372242-7823965.pdf?src-supplier=Element14, Dielectric Material=Ceramic, Height=0.8mm, JESD-609 Code=e3, Length=1.6mm, Manufacturer Part Number=C0603C101J5GACTU, Mounting Technology="Surface Mount", Multilayer=Yes, Packaging="Tape and Reel", Pins=2, Pricing="4000=0.0155, 8000=0.0104 (USD)", Reach SVHC Compliant=Yes, RoHS=Yes, RoHS Compliant=Yes, Stock=772000, Supplier=Digikey, Terminal Finish=Nickel, Termination=Wraparound, Tolerance (fill in as +-)=5%, Width=0.8mm
C8 C9: library part C0603C221J5GAC7411, "Ceramic Capacitor, Multilayer, Ceramic, 50V, 5% +Tol, 5% -Tol, C0G, 30ppm/Cel TC, 0.00022uF, Surface Mount, 0603", Capacitor Type=Ceramic, Case/Package=0603, Manufacturer=KEMET, Max Operating Temperature=125°C, Min Operating Temperature=-55°C, Package Shape=Rectangular, Package Style=SMTMeter, Rated DC Voltage (URdc)=50V, Supplier Part Number=399-C0603C221J5GAC7411CT-ND, Temperature Characteristics Code=C0G, Tolerance  (fill in as +-)=5%, Category="Ceramic Capacitors", ComponentLink1Description=https://datasheet.ciiva.com:443/pdfs/VipMasterIC/IC/KEME/KEME-S-A0007600110/KEME-S-A0007595965-1.pdf?src-supplier=IHS+Markit, ComponentLink1URL=https://datasheet.ciiva.com:443/pdfs/VipMasterIC/IC/KEME/KEME-S-A0007600110/KEME-S-A0007595965-1.pdf?src-supplier=IHS+Markit, ComponentLink2Description=https://datasheet.octopart.com/C0603C221J5GAC7411-KEMET-datasheet-149535035.pdf?src-supplier=Farnell, ComponentLink2URL=https://datasheet.octopart.com/C0603C221J5GAC7411-KEMET-datasheet-149535035.pdf?src-supplier=Farnell, ComponentLink3Description=https://api.kemet.com/component-edge/download/datasheet/C0603C221J5GAC7411.pdf?src-supplier=Digikey, ComponentLink3URL=https://api.kemet.com/component-edge/download/datasheet/C0603C221J5GAC7411.pdf?src-supplier=Digikey, ComponentLink4Description=https://datasheet.octopart.com/C0603C221J5GAC7411-Kemet-datasheet-11795438.pdf?src-supplier=Arrow+Electronics, ComponentLink4URL=https://datasheet.octopart.com/C0603C221J5GAC7411-Kemet-datasheet-11795438.pdf?src-supplier=Arrow+Electronics, ComponentLink5Description=https://datasheet.octopart.com/C0603C221J5GAC7411-Kemet-datasheet-5314449.pdf?src-supplier=Verical, ComponentLink5URL=https://datasheet.octopart.com/C0603C221J5GAC7411-Kemet-datasheet-5314449.pdf?src-supplier=Verical, ComponentLink6Description=https://datasheet.octopart.com/C0603C221J5GAC7411-KEMET-datasheet-157246123.pdf?src-supplier=Electro+Sonic, ComponentLink6URL=https://datasheet.octopart.com/C0603C221J5GAC7411-KEMET-datasheet-157246123.pdf?src-supplier=Electro+Sonic, Dielectric Material=Ceramic, Height=0.8mm, JESD-609 Code=e3, Length=1.6mm, Manufacturer Part Number=C0603C221J5GAC7411, Mounting Technology="Surface Mount", Multilayer=Yes, Packaging="Tape and Reel", Pins=2, Pricing="15000=0.0071, 30000=0.007, 45000=0.0069, 75000=0.0068, 150000=0.0067, 375000=0.0063, 750000=0.0063 (USD)", Reach SVHC Compliant=Yes, RoHS=Yes, RoHS Compliant=Yes, Stock=30000, Supplier=Digikey, Terminal Finish=Nickel, Termination=Wraparound, Tolerance (fill in as +-)=5%, Width=0.8mm
C10 C11 C17 C18: library part CC0402JRNPO9BN101, "Ceramic Capacitor, Multilayer, Ceramic, 50V, 5% +Tol, 5% -Tol, C0G, 30ppm/Cel TC, 0.0001uF, Surface Mount, 0402", Capacitor Type=Ceramic, Case/Package=0402, Manufacturer=Yageo, Max Operating Temperature=125°C, Min Operating Temperature=-55°C, Package Shape=Rectangular, Package Style=SMTMeter, Rated DC Voltage (URdc)=50V, Supplier Part Number=311-1024-1-ND, Temperature Characteristics Code=C0G, Tolerance  (fill in as +-)=5%, Category="Ceramic Capacitors", ComponentLink1Description=https://datasheet.ciiva.com:443/pdfs/VipMasterIC/IC/YAGO/YAGO-S-A0009251638/YAGO-S-A0009251638-1.pdf?src-supplier=IHS+Markit, ComponentLink1URL=https://datasheet.ciiva.com:443/pdfs/VipMasterIC/IC/YAGO/YAGO-S-A0009251638/YAGO-S-A0009251638-1.pdf?src-supplier=IHS+Markit, ComponentLink2Description=https://datasheet.ciiva.com/23767/25787-23767888.pdf?src-supplier=Newark, ComponentLink2URL=https://datasheet.ciiva.com/23767/25787-23767888.pdf?src-supplier=Newark, ComponentLink3Description=https://datasheet.ciiva.com/11786/0900766b80d84fbf-11786101.pdf?src-supplier=Rs, ComponentLink3URL=https://datasheet.ciiva.com/11786/0900766b80d84fbf-11786101.pdf?src-supplier=Rs, ComponentLink4Description=https://datasheet.ciiva.com/28450/1443161-28450220.pdf?src-supplier=Element14, ComponentLink4URL=https://datasheet.ciiva.com/28450/1443161-28450220.pdf?src-supplier=Element14, ComponentLink5Description=https://datasheet.ciiva.com/143/mlccorderingcode-143989.pdf?src-supplier=Digikey, ComponentLink5URL=https://datasheet.ciiva.com/143/mlccorderingcode-143989.pdf?src-supplier=Digikey, ComponentLink6Description=https://datasheet.ciiva.com/143/mlccorderingcode-143990.pdf?src-supplier=Digikey, ComponentLink6URL=https://datasheet.ciiva.com/143/mlccorderingcode-143990.pdf?src-supplier=Digikey, ComponentLink7Description=https://datasheet.ciiva.com/143/mlccorderingcode-143991.pdf?src-supplier=Digikey, ComponentLink7URL=https://datasheet.ciiva.com/143/mlccorderingcode-143991.pdf?src-supplier=Digikey, ComponentLink8Description=https://datasheet.ciiva.com/8033/1443161-8033598.pdf?src-supplier=Element14, ComponentLink8URL=https://datasheet.ciiva.com/8033/1443161-8033598.pdf?src-supplier=Element14, Dielectric Material=Ceramic, Height=0.5mm, JESD-609 Code=e3, Length=1mm, Manufacturer Part Number=CC0402JRNPO9BN101, Mounting Technology="Surface Mount", Multilayer=Yes, Packaging="Tape and Reel", Pins=2, Pricing="1=0.08, 10=0.013, 100=0.008, 1000=0.0056, 2500=0.004, 10000=0.0032 (USD)", Reach SVHC Compliant=Yes, RoHS=Yes, RoHS Compliant=Yes, Stock=5534890, Supplier=Digikey, Terminal Finish=Nickel, Termination=Wraparound, Tolerance (fill in as +-)=5%, Width=0.5mm
C12 C23 C24 C25 C28: library part CC0603JRX7R9BB104, "Ceramic Capacitor, Multilayer, Ceramic, 50V, 5% +Tol, 5% -Tol, X7R, 15% TC, 0.1uF, Surface Mount, 0603", Capacitor Type=Ceramic, Case/Package=0603, Manufacturer=Yageo, Max Operating Temperature=125°C, Min Operating Temperature=-55°C, Package Shape=Rectangular, Package Style=SMTMeter, Rated DC Voltage (URdc)=50V, Supplier Part Number=311-1779-1-ND, Temperature Characteristics Code=X7R, Tolerance  (fill in as +-)=5%, Category="Ceramic Capacitors", ComponentLink1Description=https://datasheet.ciiva.com:443/pdfs/VipMasterIC/IC/YAGO/YAGO-S-A0003557223/YAGO-S-A0003557223-1.pdf?src-supplier=IHS+Markit, ComponentLink1URL=https://datasheet.ciiva.com:443/pdfs/VipMasterIC/IC/YAGO/YAGO-S-A0003557223/YAGO-S-A0003557223-1.pdf?src-supplier=IHS+Markit, ComponentLink2Description=https://datasheet.ciiva.com/11465/upy-gphc-x7r-6-3v-to-50v-8-11465038.pdf?src-supplier=Avnet, ComponentLink2URL=https://datasheet.ciiva.com/11465/upy-gphc-x7r-6-3v-to-50v-8-11465038.pdf?src-supplier=Avnet, Dielectric Material=Ceramic, Height=0.8mm, JESD-609 Code=e3, Length=1.6mm, Manufacturer Part Number=CC0603JRX7R9BB104, Mounting Technology="Surface Mount", Multilayer=Yes, Packaging="Tape and Reel", Pins=2, Pricing="1=0.1, 10=0.05, 100=0.0297, 1000=0.01795 (USD)", Reach SVHC Compliant=Yes, RoHS=Yes, RoHS Compliant=Yes, Stock=91480, Supplier=Digikey, Terminal Finish=Nickel, Termination=Wraparound, Tolerance (fill in as +-)=5%, Width=0.8mm
C14: library part 06035A102JAT2A, "Ceramic Capacitor, Multilayer, Ceramic, 50V, 5% +Tol, 5% -Tol, C0G, 30ppm/Cel TC, 0.001uF, Surface Mount, 0603", Capacitor Type=Ceramic, Case/Package=0603, Manufacturer="Kyocera AVX", Max Operating Temperature=125°C, Min Operating Temperature=-55°C, Package Shape=Rectangular, Package Style=SMTMeter, Rated DC Voltage (URdc)=50V, Supplier Part Number=KGM15ACG1H102JT, Temperature Characteristics Code=C0G, Tolerance  (fill in as +-)=5%, Category="Ceramic Capacitors", ComponentLink1Description=https://datasheet.ciiva.com:443/pdfs/VipMasterIC/IC/AVXC/AVXC-S-A0008899940/AVXC-S-A0008899940-1.pdf?src-supplier=IHS+Markit, ComponentLink1URL=https://datasheet.ciiva.com:443/pdfs/VipMasterIC/IC/AVXC/AVXC-S-A0008899940/AVXC-S-A0008899940-1.pdf?src-supplier=IHS+Markit, ComponentLink2Description=https://datasheet.ciiva.com/11786/0900766b802d4697-11786950.pdf?src-supplier=Rs, ComponentLink2URL=https://datasheet.ciiva.com/11786/0900766b802d4697-11786950.pdf?src-supplier=Rs, ComponentLink3Description=https://datasheet.ciiva.com/11464/ccog-11464573.pdf?src-supplier=Avnet, ComponentLink3URL=https://datasheet.ciiva.com/11464/ccog-11464573.pdf?src-supplier=Avnet, ComponentLink4Description=https://datasheet.ciiva.com/16363/ccog-16363640.pdf?src-supplier=Future+Electronics, ComponentLink4URL=https://datasheet.ciiva.com/16363/ccog-16363640.pdf?src-supplier=Future+Electronics, ComponentLink5Description=https://datasheet.ciiva.com/1124/759117-1124717.pdf?src-supplier=Element14, ComponentLink5URL=https://datasheet.ciiva.com/1124/759117-1124717.pdf?src-supplier=Element14, ComponentLink6Description=https://datasheet.ciiva.com/1124/759117-1124716.pdf?src-supplier=Element14, ComponentLink6URL=https://datasheet.ciiva.com/1124/759117-1124716.pdf?src-supplier=Element14, ComponentLink7Description=https://datasheet.ciiva.com/1466/26712-1466099.pdf?src-supplier=Farnell, ComponentLink7URL=https://datasheet.ciiva.com/1466/26712-1466099.pdf?src-supplier=Farnell, ComponentLink8Description=https://datasheet.ciiva.com/1124/26712-1124715.pdf?src-supplier=Element14, ComponentLink8URL=https://datasheet.ciiva.com/1124/26712-1124715.pdf?src-supplier=Element14, ComponentLink9Description=https://datasheet.ciiva.com/150/ccog-150886.pdf?src-supplier=Digikey, ComponentLink9URL=https://datasheet.ciiva.com/150/ccog-150886.pdf?src-supplier=Digikey, ComponentLink10Description=https://datasheet.ciiva.com/150/ccog-150885.pdf?src-supplier=Digikey, ComponentLink10URL=https://datasheet.ciiva.com/150/ccog-150885.pdf?src-supplier=Digikey, ComponentLink11Description=https://datasheet.ciiva.com/150/ccog-150887.pdf?src-supplier=Digikey, ComponentLink11URL=https://datasheet.ciiva.com/150/ccog-150887.pdf?src-supplier=Digikey, ComponentLink12Description=https://datasheet.ciiva.com/14585/70001039-14585948.pdf?src-supplier=Allied+Electronics, ComponentLink12URL=https://datasheet.ciiva.com/14585/70001039-14585948.pdf?src-supplier=Allied+Electronics, Dielectric Material=Ceramic, Height=0.9mm, JESD-609 Code=e3, Length=1.6mm, Manufacturer Part Number=06035A102JAT2A, Mounting Technology="Surface Mount", Multilayer=Yes, Packaging="Tape and Reel", Pins=2, Pricing="4000=0.00488, 8000=0.00454, 16000=0.00447, 24000=0.00439, 32000=0.00431 (USD)", Reach SVHC Compliant=Yes, RoHS=Yes, RoHS Compliant=Yes, Stock=540000, Supplier=Avnet, Terminal Finish=Nickel, Termination=Wraparound, Tolerance (fill in as +-)=5%, Width=0.81mm
C15: library part C0603C101J5GACTU, "Ceramic Capacitor, Multilayer, Ceramic, 50V, 5% +Tol, 5% -Tol, C0G, 30ppm/Cel TC, 0.0001uF, Surface Mount, 0603", Capacitor Type=Ceramic, Case/Package=0603, Manufacturer=KEMET, Max Operating Temperature=125°C, Min Operating Temperature=-55°C, Package Shape=Rectangular, Package Style=SMTMeter, Rated DC Voltage (URdc)=50V, Temperature Characteristics Code=C0G, Tolerance  (fill in as +-)=5%, Category="Ceramic Capacitors", ComponentLink1Description=https://datasheet.ciiva.com:443/pdfs/VipMasterIC/IC/KEME/KEME-S-A0005605168/KEME-S-A0005605168-1.pdf?src-supplier=IHS+Markit, ComponentLink1URL=https://datasheet.ciiva.com:443/pdfs/VipMasterIC/IC/KEME/KEME-S-A0005605168/KEME-S-A0005605168-1.pdf?src-supplier=IHS+Markit, ComponentLink2Description=https://datasheet.ciiva.com/6126/f9080b-0402-series-c0g-6126680.pdf?src-supplier=Farnell, ComponentLink2URL=https://datasheet.ciiva.com/6126/f9080b-0402-series-c0g-6126680.pdf?src-supplier=Farnell, ComponentLink3Description=https://datasheet.ciiva.com/28645/1789732-28645525.pdf?src-supplier=Element14, ComponentLink3URL=https://datasheet.ciiva.com/28645/1789732-28645525.pdf?src-supplier=Element14, ComponentLink4Description=https://datasheet.ciiva.com/7823/1725423-7823564.pdf?src-supplier=Element14, ComponentLink4URL=https://datasheet.ciiva.com/7823/1725423-7823564.pdf?src-supplier=Element14, ComponentLink5Description=https://datasheet.ciiva.com/7823/1725423-7823565.pdf?src-supplier=Element14, ComponentLink5URL=https://datasheet.ciiva.com/7823/1725423-7823565.pdf?src-supplier=Element14, ComponentLink6Description=https://datasheet.ciiva.com/7823/f9080b-0402-series-c0g-7823964.pdf?src-supplier=Element14, ComponentLink6URL=https://datasheet.ciiva.com/7823/f9080b-0402-series-c0g-7823964.pdf?src-supplier=Element14, ComponentLink7Description=https://datasheet.ciiva.com/7823/1372242-7823965.pdf?src-supplier=Element14, ComponentLink7URL=https://datasheet.ciiva.com/7823/1372242-7823965.pdf?src-supplier=Element14, Dielectric Material=Ceramic, Height=0.8mm, JESD-609 Code=e3, Length=1.6mm, Manufacturer Part Number=C0603C101J5GACTU, Mounting Technology="Surface Mount", Multilayer=Yes, Packaging="Tape and Reel", Pins=2, Pricing="4000=0.0155, 8000=0.0104 (USD)", Reach SVHC Compliant=Yes, RoHS=Yes, RoHS Compliant=Yes, Stock=772000, Supplier="Arrow Electronics", Supplier Part Number=C0603C101J5GACTU, Terminal Finish=Nickel, Termination=Wraparound, Tolerance (fill in as +-)=5%, Width=0.8mm
C16: library part C0402C152F4HACAUTO, "Ceramic Capacitor, Multilayer, Ceramic, 16V, 1% +Tol, 1% -Tol, X8R, 15% TC, 0.0015uF, Surface Mount, 0402", Capacitor Type=Ceramic, Manufacturer=KEMET, Supplier Part Number=399-C0402C152F4HACAUTOCT-ND, Category="Ceramic Capacitors", ComponentLink1Description=https://datasheet.ciiva.com:443/pdfs/VipMasterIC/IC/KEME/KEME-S-A0008958458/KEME-S-A0008958458-1.pdf?src-supplier=IHS+Markit, ComponentLink1URL=https://datasheet.ciiva.com:443/pdfs/VipMasterIC/IC/KEME/KEME-S-A0008958458/KEME-S-A0008958458-1.pdf?src-supplier=IHS+Markit, ComponentLink2Description=https://api.kemet.com/component-edge/download/datasheet/C0402C152F4HACAUTO.pdf?src-supplier=Digikey, ComponentLink2URL=https://api.kemet.com/component-edge/download/datasheet/C0402C152F4HACAUTO.pdf?src-supplier=Digikey, Dielectric Material=Ceramic, Manufacturer Part Number=C0402C152F4HACAUTO, Pins=2, Pricing="1=0.21, 10=0.119, 100=0.0745, 1000=0.05163, 2500=0.0442, 5000=0.04255 (USD)", Reach SVHC Compliant=Yes, RoHS=Yes, RoHS Compliant=Yes, Stock=19436, Supplier=Digikey
C19: library part GRM155R71C224KA12D, "Ceramic Capacitor, Multilayer, Ceramic, 16V, 10% +Tol, 10% -Tol, X7R, 15% TC, 0.22uF, Surface Mount, 0402", Capacitor Type=Ceramic, Case/Package=0402, Manufacturer=Murata, Max Operating Temperature=125°C, Min Operating Temperature=-55°C, Package Shape=Rectangular, Package Style=SMTMeter, Rated DC Voltage (URdc)=16V, Supplier Part Number=490-5418-1-ND, Temperature Characteristics Code=X7R, Tolerance  (fill in as +-)=10%, Category="Ceramic Capacitors", ComponentLink1Description=https://datasheet.ciiva.com:443/pdfs/VipMasterIC/IC/MURE/MURE-S-A0008911298/MURE-S-A0008911313-1.pdf?src-supplier=IHS+Markit, ComponentLink1URL=https://datasheet.ciiva.com:443/pdfs/VipMasterIC/IC/MURE/MURE-S-A0008911298/MURE-S-A0008911313-1.pdf?src-supplier=IHS+Markit, ComponentLink2Description=https://datasheet.ciiva.com/132/product-132672.pdf?src-supplier=Digikey, ComponentLink2URL=https://datasheet.ciiva.com/132/product-132672.pdf?src-supplier=Digikey, ComponentLink3Description=https://datasheet.ciiva.com/18184/getdatasheetpartid-347270-18184668.pdf?src-supplier=Verical, ComponentLink3URL=https://datasheet.ciiva.com/18184/getdatasheetpartid-347270-18184668.pdf?src-supplier=Verical, ComponentLink4Description=https://datasheet.ciiva.com/29199/454127-da-01-en-vs-kondensator-0402-29199807.pdf?src-supplier=Conrad, ComponentLink4URL=https://datasheet.ciiva.com/29199/454127-da-01-en-vs-kondensator-0402-29199807.pdf?src-supplier=Conrad, ComponentLink5Description=https://datasheet.ciiva.com/132/partnumbering-e-01-132670.pdf?src-supplier=Digikey, ComponentLink5URL=https://datasheet.ciiva.com/132/partnumbering-e-01-132670.pdf?src-supplier=Digikey, ComponentLink6Description=https://datasheet.ciiva.com/132/partnumbering-e-01-132671.pdf?src-supplier=Digikey, ComponentLink6URL=https://datasheet.ciiva.com/132/partnumbering-e-01-132671.pdf?src-supplier=Digikey, ComponentLink7Description=https://datasheet.ciiva.com/48671/product-48671325.pdf?src-supplier=Avnet, ComponentLink7URL=https://datasheet.ciiva.com/48671/product-48671325.pdf?src-supplier=Avnet, ComponentLink8Description=https://datasheet.ciiva.com/16467/product-16467307.pdf?src-supplier=Future+Electronics, ComponentLink8URL=https://datasheet.ciiva.com/16467/product-16467307.pdf?src-supplier=Future+Electronics, Dielectric Material=Ceramic, Height=0.5mm, JESD-609 Code=e3, Length=1mm, Manufacturer Part Number=GRM155R71C224KA12D, Mounting Technology="Surface Mount", Multilayer=Yes, Packaging="Tape and Reel", Pins=2, Pricing="1=0.1, 10=0.027, 50=0.027, 100=0.018, 1000=0.012, 10000=0.008 (USD)", Reach SVHC Compliant=Yes, RoHS=Yes, RoHS Compliant=Yes, Stock=303816, Supplier=Digikey, Terminal Finish=Nickel, Termination=Wraparound, Tolerance (fill in as +-)=10%, Width=0.5mm
C20: library part GCM1555C1H751FA16D, "Ceramic Capacitor, Multilayer, Ceramic, 50V, 1% +Tol, 1% -Tol, C0G, 30ppm/Cel TC, 0.00075uF, Surface Mount, 0402", Capacitor Type=Ceramic, Case/Package=0402, Manufacturer=Murata, Max Operating Temperature=125°C, Min Operating Temperature=-55°C, Package Shape=Rectangular, Rated DC Voltage (URdc)=50V, Supplier Part Number=490-GCM1555C1H751FA16DCT-ND, Temperature Characteristics Code=C0G, Tolerance  (fill in as +-)=1%, Category="Ceramic Capacitors", ComponentLink1Description=https://psearch.en.murata.com:443/capacitor/product/GCM1555C1H751FA16%23.pdf?src-supplier=IHS+Markit, ComponentLink1URL=https://psearch.en.murata.com:443/capacitor/product/GCM1555C1H751FA16%23.pdf?src-supplier=IHS+Markit, Dielectric Material=Ceramic, JESD-609 Code=e3, Manufacturer Part Number=GCM1555C1H751FA16D, Mounting Technology="Surface Mount", Multilayer=Yes, Packaging="Tape and Reel", Pins=2, Pricing="1=0.1, 10=0.044, 100=0.026, 1000=0.01666, 2500=0.01436, 5000=0.01297 (USD)", Reach SVHC Compliant=Yes, Reference Standard=AEC-Q200, RoHS=Yes, RoHS Compliant=Yes, Stock=11851, Supplier=Digikey, Terminal Finish=Nickel, Termination=Wraparound, Tolerance (fill in as +-)=1%
C21: library part CC0603JRX7R8BB334, "Ceramic Capacitor, Multilayer, Ceramic, 25V, 5% +Tol, 5% -Tol, X7R, 15% TC, 0.33uF, Surface Mount, 0603", Capacitor Type=Ceramic, Case/Package=0603, Manufacturer=Yageo, Max Operating Temperature=125°C, Min Operating Temperature=-55°C, Package Style=SMTMeter, Rated DC Voltage (URdc)=25V, Supplier Part Number=13-CC0603JRX7R8BB334CT-ND, Temperature Characteristics Code=X7R, Tolerance  (fill in as +-)=5%, Category="Ceramic Capacitors", Dielectric Material=Ceramic, Height=0.8mm, JESD-609 Code=e3, Length=1.6mm, Manufacturer Part Number=CC0603JRX7R8BB334, Multilayer=Yes, Packaging="Tape and Reel", Pins=2, Pricing="1=0.15, 10=0.086, 100=0.0527, 1000=0.03562 (USD)", Reach SVHC Compliant=Yes, RoHS=Yes, RoHS Compliant=Yes, Series=SIZE(X7R), Stock=30027, Supplier=Digikey, Terminal Finish=Nickel, Tolerance (fill in as +-)=5%, Width=0.8mm